# EAGLE board Ladder_Filter_IF_Amplifier (EAGLE 5.07)
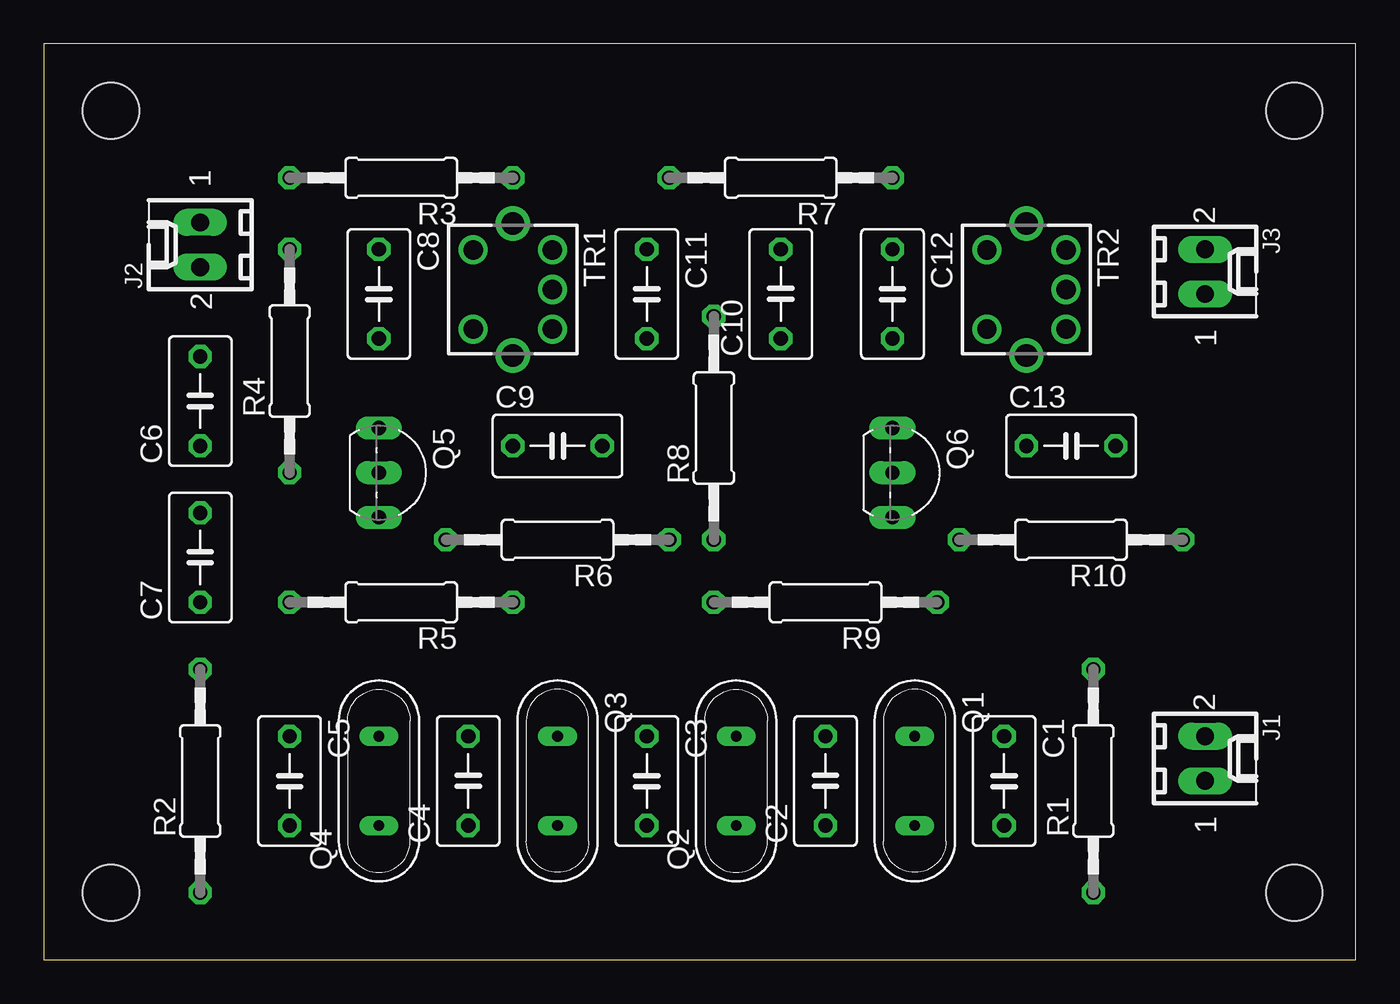
[diagram p0: board, top side]
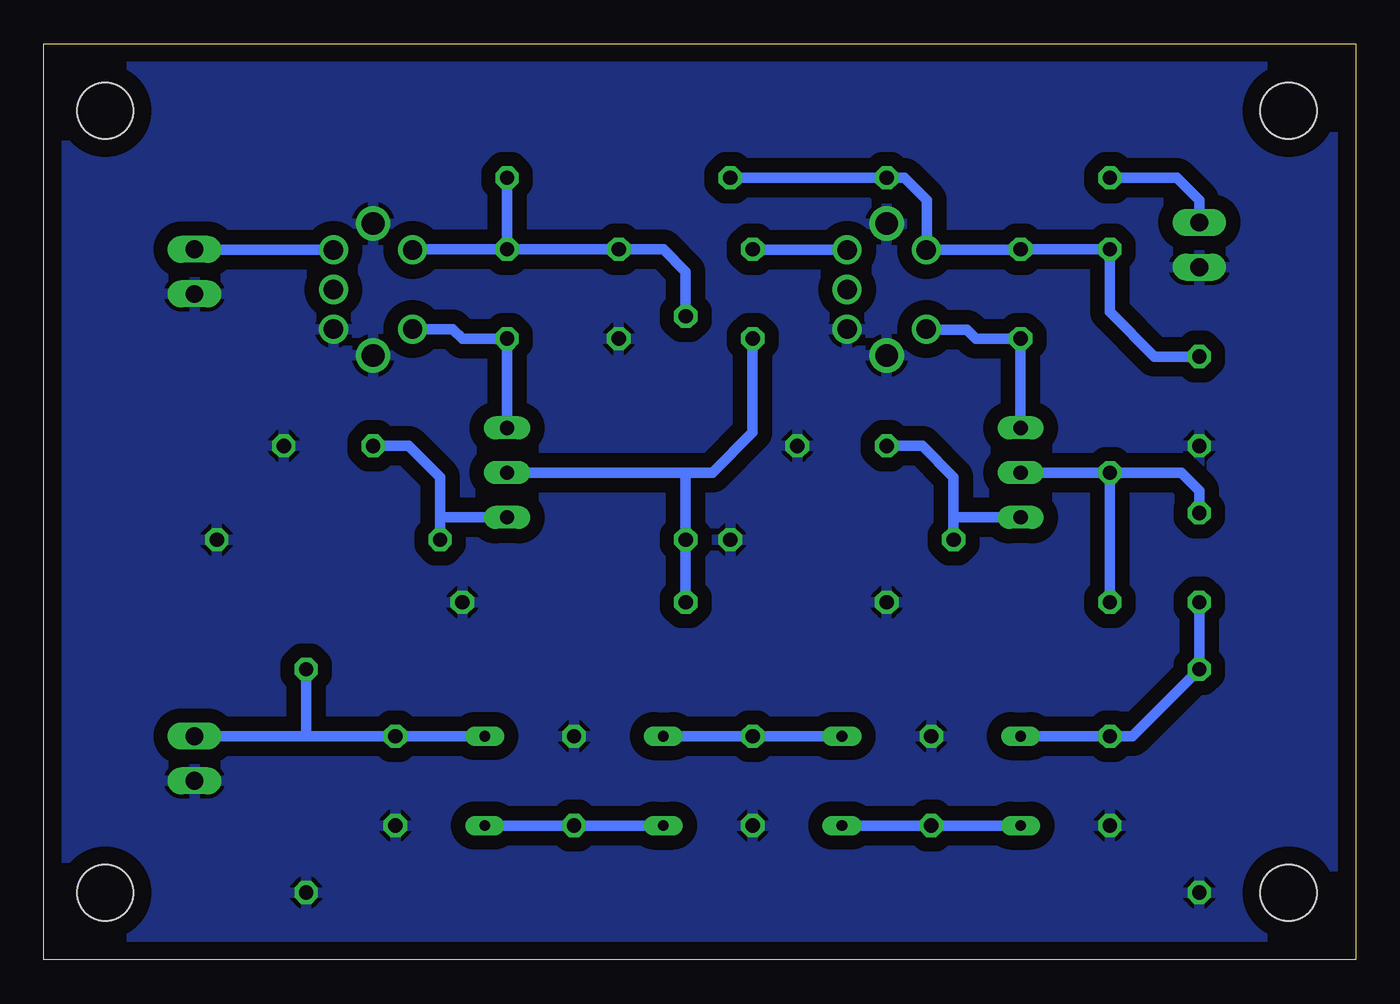
[diagram p1: board, bottom side, seen from below]

Size 74.6 x 52.06 mm. Coordinates in mm from the lower left corner, seen from the top.
Outline: 0,0 74.6,0 74.6,52.06 0,52.06 0,0
Copper layers (1*16): Top 0.035mm / dielectric 1.5mm / Bottom 0.035mm
Design rules "default": minimum track width 10mil, minimum drill 24mil, track to track 8mil, track to pad 8mil, pad to pad 8mil, via to via 8mil, smd to smd 8mil, copper to edge 40mil, drill to drill 8mil, minimum pad ring 10mil, minimum via ring 8mil, stop-mask expansion 4mil, vias tented up to drill 0mil, thermal gap 10mil
Holes 3.2 mm at 3.81,48.26 71.12,48.26 71.12,3.81 3.81,3.81

## Footprints (pad centres in the part's own frame; a part is rotated, then mirrored left to right if it is on the bottom)
C050-035X075 = drill 0.813 octagon: 1 -2.54,0; 2 2.54,0
6410-02 = drill 1.016 long: 1 1.27,0; 2 -1.27,0
QS = drill 0.61 long: 1 -2.54,0; 2 2.54,0
TO92-EBC = drill 0.813 long: B 0,-1.27; C -2.54,-1.27; E 2.54,-1.27
0207/12 = drill 0.813 octagon: 1 -6.35,0; 2 6.35,0
71K = drill 1.1 round: 1 -2.25,-2.25; 2 -2.25,2.25; 3 0,2.25; 4 2.25,2.25; 5 2.25,-2.25 | drill 1.3 round: S1 -3.75,0; S2 3.75,0

## Placement (x,y rotation side)
C1  15pF  [C050-035X075]  54.61,10.16 270 top
C2  22pF  [C050-035X075]  44.45,10.16 90 top
C3  47pF  [C050-035X075]  34.29,10.16 270 top
C4  22pF  [C050-035X075]  24.13,10.16 90 top
C5  15pF  [C050-035X075]  13.97,10.16 270 top
C6  0.01uF  [C050-035X075]  8.89,31.75 90 top
C7  470pF  [C050-035X075]  8.89,22.86 90 top
C8  180pF  [C050-035X075]  19.05,37.85 270 top
C9  0.01uF  [C050-035X075]  29.21,29.21 0 top
C10  0.01uF  [C050-035X075]  41.91,37.85 90 top
C11  0.01uF  [C050-035X075]  34.29,37.85 270 top
C12  180pF  [C050-035X075]  48.26,37.85 270 top
C13  0.01uF  [C050-035X075]  58.42,29.21 0 top
J1  [6410-02]  66.04,11.43 270 top
J2  [6410-02]  8.89,40.64 90 top
J3  [6410-02]  66.04,39.12 270 top
Q1  4.43MHz  [QS]  49.53,10.16 270 top
Q2  4.43MHz  [QS]  39.37,10.16 90 top
Q3  4.43MHz  [QS]  29.21,10.16 270 top
Q4  4.43MHz  [QS]  19.05,10.16 90 top
Q5  BC548B  [TO92-EBC]  20.32,27.69 270 top
Q6  BC548B  [TO92-EBC]  49.53,27.69 270 top
R1  1k  [0207/12]  59.69,10.16 90 top
R2  1k  [0207/12]  8.89,10.16 90 top
R3  150E  [0207/12]  20.32,44.45 180 top
R4  47k  [0207/12]  13.97,34.04 90 top
R5  3k3  [0207/12]  20.32,20.32 180 top
R6  3k3  [0207/12]  29.21,23.88 180 top
R7  150E  [0207/12]  41.91,44.45 180 top
R8  33k  [0207/12]  38.1,30.23 90 top
R9  3k3  [0207/12]  44.45,20.32 180 top
R10  3k3  [0207/12]  58.42,23.88 180 top
TR1  71K-1524  [71K]  26.67,38.1 270 top
TR2  71K-1524  [71K]  55.88,38.1 270 top

## Library data of the parts
C1-C13 R1-R10 = rcl
J1-J3 = con-molex
Q1-Q4 = special
Q5 Q6 = transistor-npn
TR1 TR2 = inductor-neosid

## Nets
GND: C1.2 C2.2 C3.2 C4.2 C5.2 C6.1 C9.2 C10.1 C13.2 J1.1 J2.2 J3.1 R1.1 R2.1 R5.1 R6.1 R9.1 R10.1 TR1.4 TR1.S1 TR1.S2 TR2.4 TR2.S1 TR2.S2
LADDER: C5.1 C7.1 Q4.2 R2.2
N$1: C2.1 Q1.2 Q2.1
N$2: C3.1 Q2.2 Q3.1
N$3: C4.1 Q3.2 Q4.1
N$4: J2.1 R3.2
N$5: C7.2 Q5.B R4.1 R5.2
N$6: C6.2 C8.1 R3.1 R4.2 R7.2 TR1.1
N$7: C9.1 Q5.E R6.2
N$8: J3.2 TR2.2
N$9: C10.2 C12.1 R7.1 R8.2 TR2.1
N$10: C11.2 Q6.B R8.1 R9.2
N$11: C13.1 Q6.E R10.2
N$13: C8.2 Q5.C TR1.5
N$15: C11.1 TR1.2
N$16: C12.2 Q6.C TR2.5
N$18: C1.1 J1.2 Q1.1 R1.2

## Tracks (layer width: path | path; a pad name or v marks a point on that pad's centre or on a via)
GND
  pour Bottom (isolate 0.813): 0.51,51.56 74.17,51.56 74.17,0.76 0.51,0.76
LADDER
  Bottom 0.61: C7.1 R2.2 12.7,12.7 C5.1 Q4.2
N$1
  Bottom 0.61: Q2.1 C2.1 Q1.2
N$2
  Bottom 0.61: Q3.1 C3.1 Q2.2
N$3
  Bottom 0.61: Q4.1 C4.1 Q3.2
N$4
  Bottom 0.61: R3.2 10.16,44.45 8.89,43.18 J2.1
N$5
  Bottom 0.61: R4.1 Q5.B | R4.1 R5.2 | R4.1 9.91,27.69 8.89,26.67 C7.2
N$6
  Bottom 0.61: R7.2 R3.1 25.65,44.45 24.38,43.18 24.38,40.39 TR1.1 19.09,40.35 C8.1 R4.2 13.97,36.83 11.43,34.29 C6.2
N$7
  Bottom 0.61: C9.1 24.64,29.21 22.86,27.43 22.86,25.15 | 22.86,25.15 R6.2 | Q5.E 22.86,25.15
N$8
  Bottom 0.61: TR2.2 66,40.35 J3.2
N$9
  Bottom 0.61: C12.1 R7.1 | C12.1 C10.2 39.37,40.39 38.1,39.12 R8.2 | C12.1 53.59,40.39 TR2.1
N$10
  Bottom 0.61: R9.2 R8.1 38.1,27.69 | 38.1,27.69 36.58,27.69 34.29,29.97 C11.2 | 38.1,27.69 Q6.B
N$11
  Bottom 0.61: C13.1 53.85,29.21 52.07,27.43 52.07,25.15 | 52.07,25.15 R10.2 | Q6.E 52.07,25.15
N$13
  Bottom 0.61: Q5.C C8.2 21.59,35.31 22.1,35.81 24.38,35.81 TR1.5
N$15
  Bottom 0.61: TR1.2 34.25,40.35 C11.1
N$16
  Bottom 0.61: Q6.C C12.2 50.8,35.31 51.34,35.85 TR2.5
N$18
  Bottom 0.61: Q1.1 C1.1 59.69,12.7 | 59.69,12.7 J1.2 | 59.69,12.7 R1.2